# Allegro board circuit_r3.brd
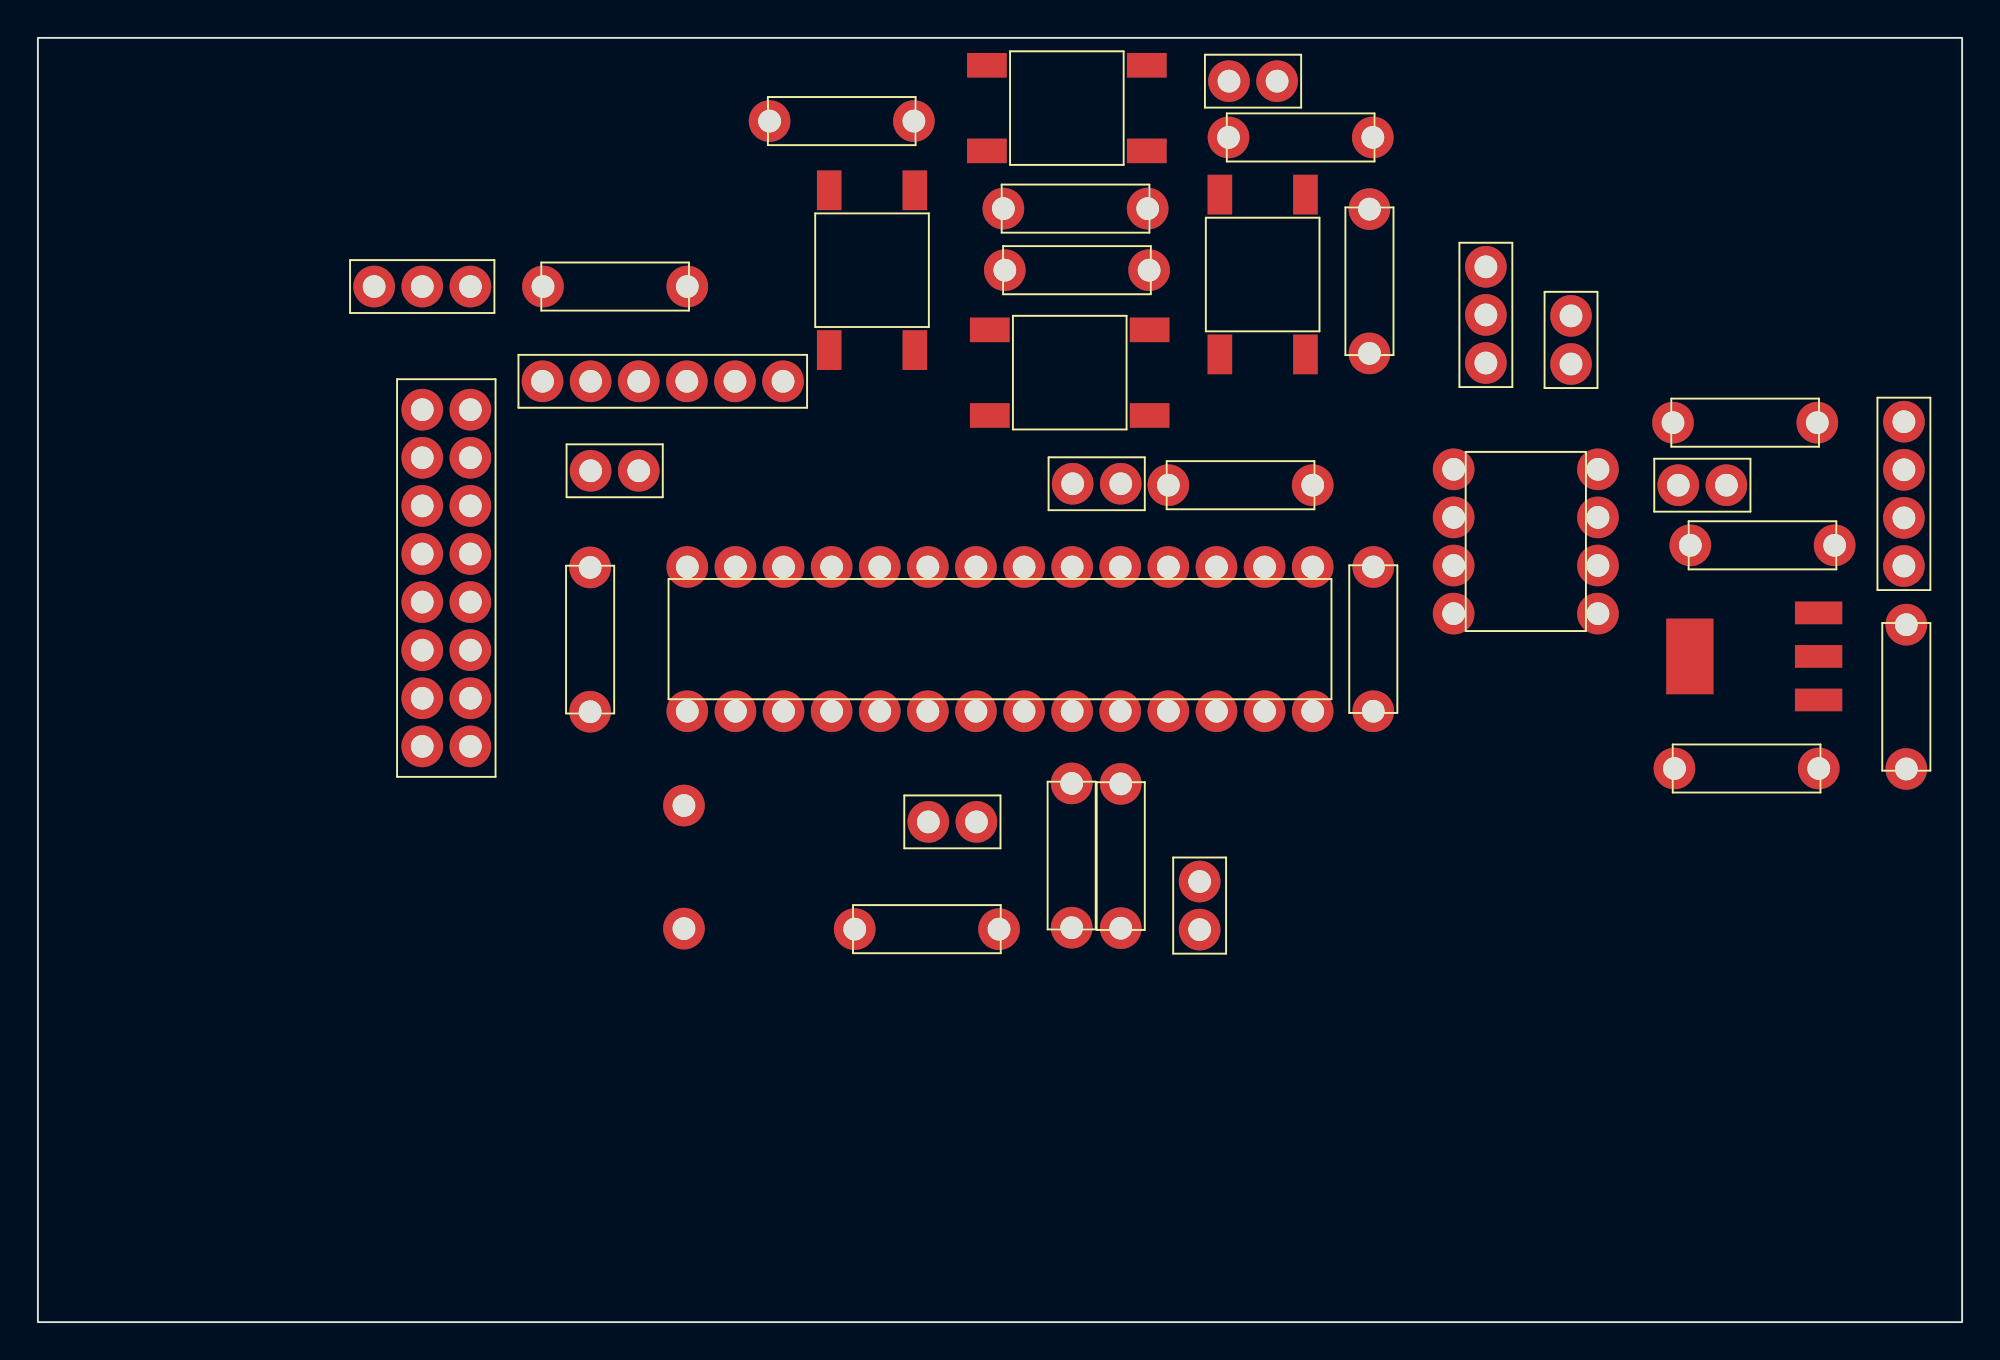
[diagram p0: board, top side]
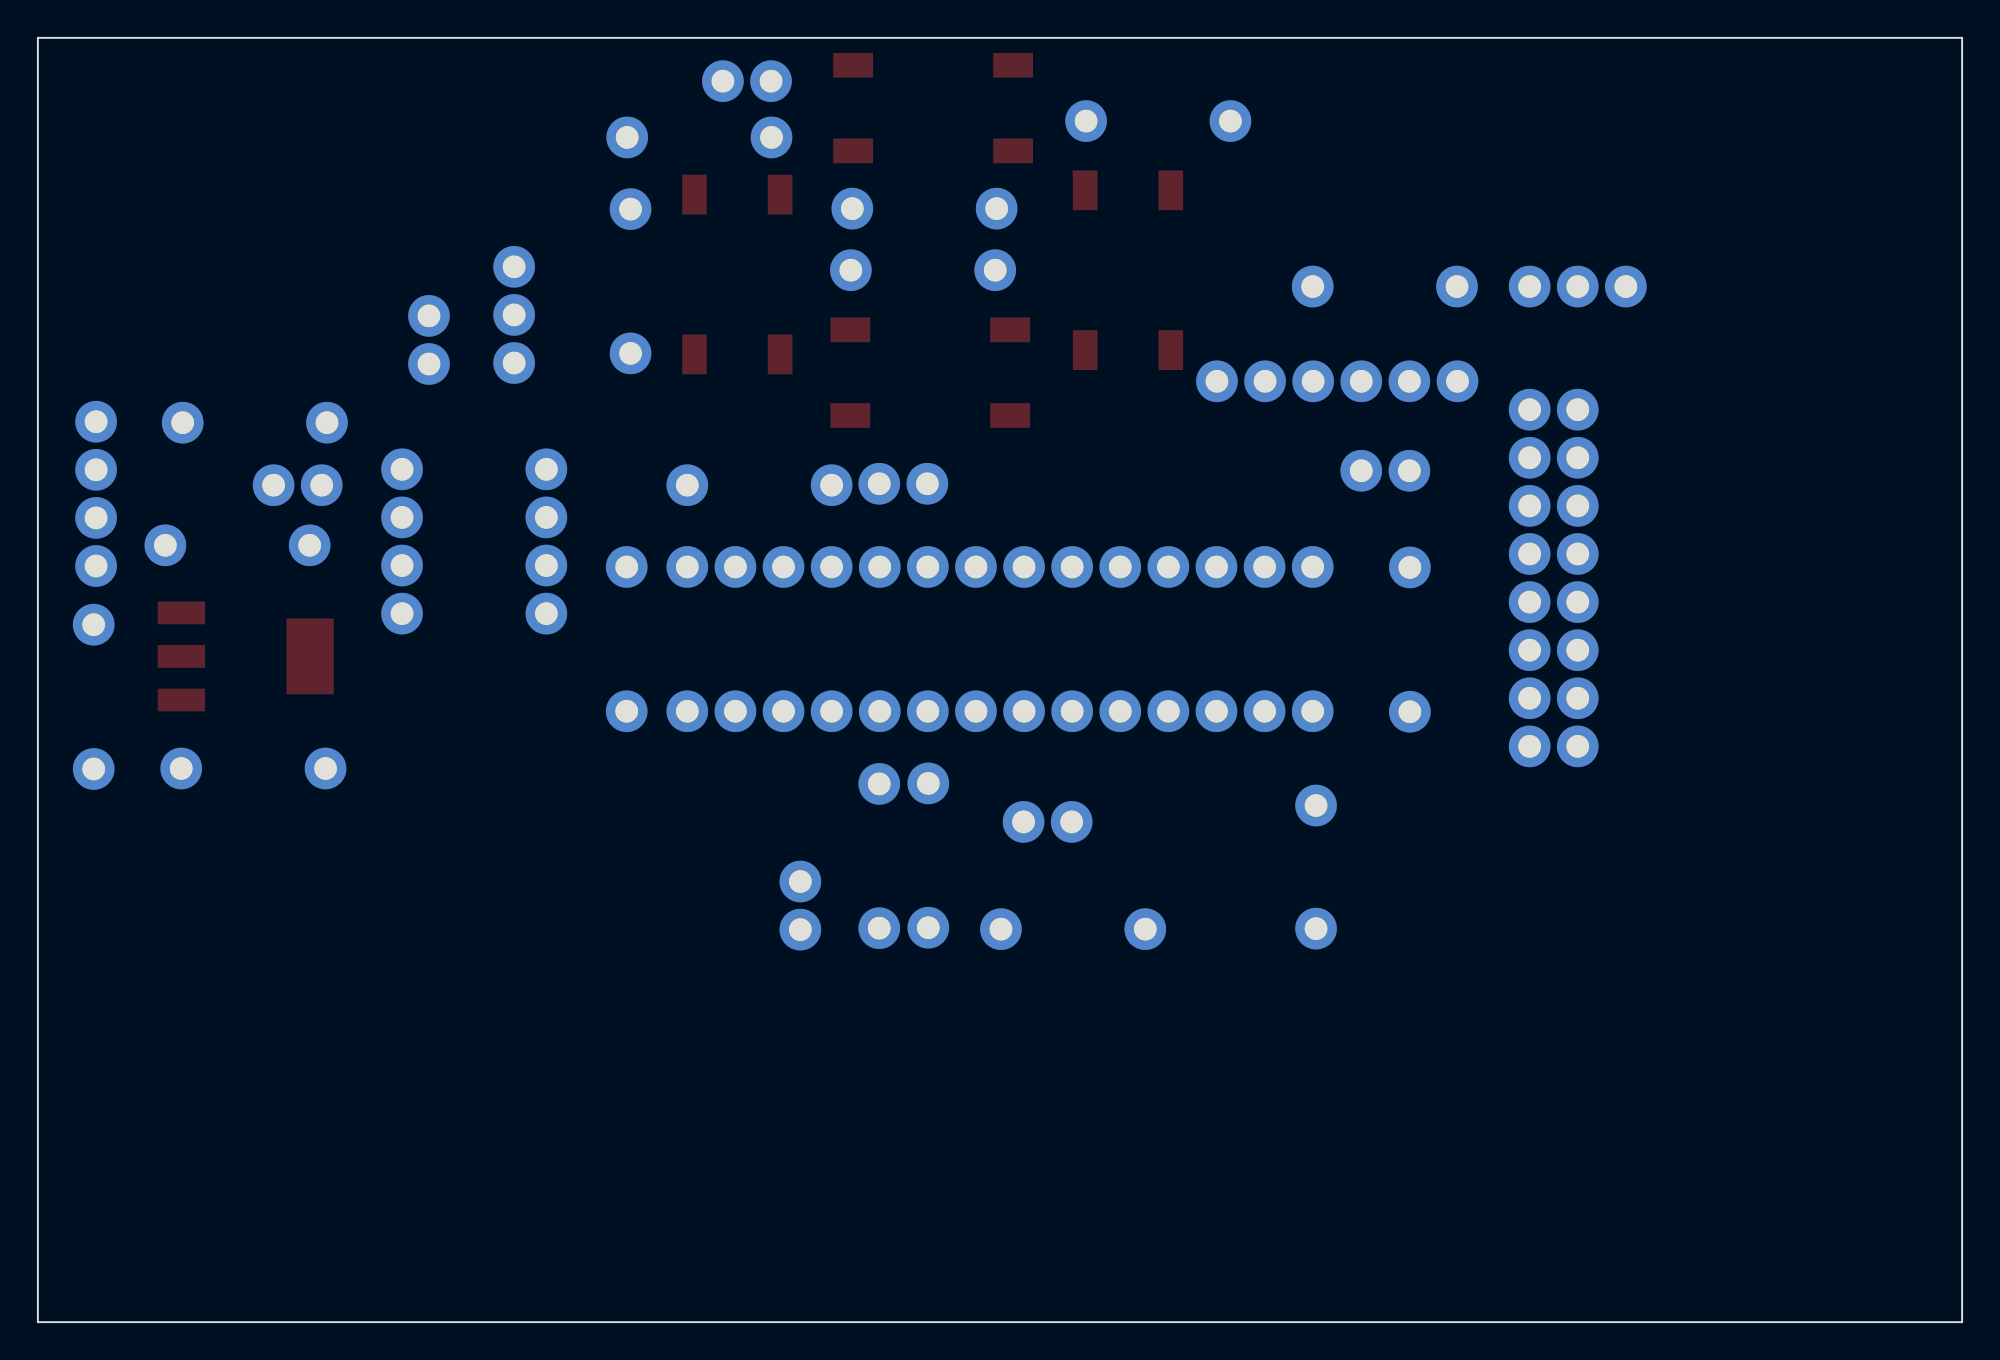
[diagram p1: board, bottom side, seen from below]

Outline 101.6 x 67.82 mm; copper layers: TOP, BOTTOM. Coordinates in mm from the lower left corner of the outline.
Outline path: rectangle 0,0 101.6,67.82

## Placement (name value [footprint] x y rotation side)
C1  10u (16V)  [CAPACITOR]  48.29 26.42 270 top
C2  100n  [CAPACITOR]  30.45 44.96 270 top
C3  100n  [CAPACITOR]  55.91 44.27 270 top
C4  4.7u  [CAPACITOR]  87.88 44.2 270 top
C5  10u  [CAPACITOR]  80.95 51.87 180 top
D2  1N6266/TO  [LED]  64.16 65.53 90 top
D3  1N6266/TO  [LED]  61.34 22 180 top
J1  ICSP  [HEADER_LINE_6]  32.99 49.68 90 top
J2  CAN  [HEADER_LINE_4]  98.53 43.74 180 top
J3  I2C  [HEADER_LINE_3]  76.45 53.19 0 top
R1  10k  [RESISTOR]  30.48 54.69 90 top
R2  470  [RESISTOR]  29.16 36.04 180 top
R3  120  [RESISTOR]  91.06 41.02 90 top
R4  4.7k  [RESISTOR]  90.14 47.5 270 top
R5  20K  [POT]  20.29 54.69 90 top
R6  330  [RESISTOR]  98.65 33.02 180 top
R7  1k  [RESISTOR]  90.22 29.24 90 top
R8  4.3k  [RESISTOR]  46.94 20.75 90 top
R9  10k  [RESISTOR]  54.58 24.64 180 top
R10  10k  [RESISTOR]  70.51 36.07 180 top
R11  10k  [RESISTOR]  63.5 44.2 270 top
R12  10k  [RESISTOR]  70.31 54.97 180 top
R13  10k  [RESISTOR]  54.86 55.55 270 top
R14  10k  [RESISTOR]  42.44 63.42 270 top
R15  10k  [RESISTOR]  54.79 58.8 270 top
R16  1k  [RESISTOR]  66.67 62.56 90 top
R17  1k  [RESISTOR]  57.18 24.61 180 top
S1  SWITCH  [SWITCH_SMD]  64.67 55.32 270 top
S2  SWITCH  [SWITCH_SMD]  54.48 50.14 0 top
S3  SWITCH  [SWITCH_SMD]  44.04 55.55 270 top
S4  SWITCH  [SWITCH_SMD]  54.33 64.11 180 top
U2  MCP2551  [DIP8]  78.56 41.22 0 top
U3  PIC18F2XK80  [DIP28]  50.8 36.07 90 top
U4  LCD  [HEADER16]  21.56 39.29 0 top
U5  SPX1117  [SOT223]  87.22 35.15 90 top
U6  -  [BUZZER]  34.11 27.28 270 top

## Library data of the parts
C1-C3 C5 = C
C4 = C_elect_0
D2 D3 = 1N6266/TO_0
J1 = CON6
J2 = CON4
J3 = CON3
R1-R4 R6-R17 = R
R5 = POT
S1-S4 = SWITCH
U2 = MCP2551
U3 = PIC18F2XK80
U4 = LCDSCREEN
U5 = SPX1117
U6 = BUZZER

## Footprints (pads in the part's own frame, mm; a bottom-side part is the same pattern mirrored in y, then rotated)
BUZZER
  round 2.2 hole 1.2 unplated: (0,0) (6.5,0)
CAPACITOR
  round 2.2 hole 1.2 unplated: (0,1.27) (0,-1.27)
DIP8
  round 2.2 hole 1.2 unplated: (-3.81,3.81) (-3.81,1.27) (-3.81,-1.27) (-3.81,-3.81) (3.81,3.81) (3.81,1.27) (3.81,-1.27) (3.81,-3.81)
DIP28
  round 2.2 hole 1.2 unplated: (-3.81,16.51) (-3.81,13.97) (-3.81,11.43) (-3.81,8.89) (-3.81,6.35) (-3.81,3.81) (-3.81,1.27) (-3.81,-1.27) (-3.81,-3.81) (-3.81,-6.35) (-3.81,-8.89) (-3.81,-11.43) (-3.81,-13.97) (-3.81,-16.51) (3.81,16.51) (3.81,13.97) (3.81,11.43) (3.81,8.89) (3.81,6.35) (3.81,3.81) (3.81,1.27) (3.81,-1.27) (3.81,-3.81) (3.81,-6.35) (3.81,-8.89) (3.81,-11.43) (3.81,-13.97) (3.81,-16.51)
HEADER16
  round 2.2 hole 1.2 unplated: (-1.27,8.89) (-1.27,6.35) (-1.27,3.81) (-1.27,1.27) (-1.27,-1.27) (-1.27,-3.81) (-1.27,-6.35) (-1.27,-8.89) (1.27,8.89) (1.27,6.35) (1.27,3.81) (1.27,1.27) (1.27,-1.27) (1.27,-3.81) (1.27,-6.35) (1.27,-8.89)
HEADER_LINE_3
  round 2.2 hole 1.2 unplated: (0,2.54) (0,0) (0,-2.54)
HEADER_LINE_4
  round 2.2 hole 1.2 unplated: (0,3.81) (0,1.27) (0,-1.27) (0,-3.81)
HEADER_LINE_6
  round 2.2 hole 1.2 unplated: (0,6.35) (0,3.81) (0,1.27) (0,-1.27) (0,-3.81) (0,-6.35)
LED
  round 2.2 hole 1.2 unplated: (0,1.27) (0,-1.27)
POT
  round 2.2 hole 1.2 unplated: (0,2.54) (0,0) (0,-2.54)
RESISTOR
  round 2.2 hole 1.2 unplated: (0,3.81) (0,-3.81)
SOT223
  rect 1.2x2.5 smd: 1(-2.3,-6.8) 2(0,-6.8) 3(2.3,-6.8)
  rect 4x2.5 smd: 4(0,0)
SWITCH_SMD
  rect 2.1x1.3 smd: 1(-4.22,2.26) 2(4.22,2.26) 3(4.22,-2.26) 4(-4.22,-2.26)

## Nets
5.0V: U5.2(VOUT)
8V: U5.3(VIN)
GND: S1.3 S1.4 S2.3 S2.4 S3.3 S3.4 S4.3 S4.4
NU: U5.4
PB1: S1.1 S1.2
PB2: S2.1 S2.2
PB3: S3.1 S3.2
PB4: S4.1 S4.2
N05390: U5.1(ADJ)
